# EAGLE board AL60 (EAGLE 5.11)
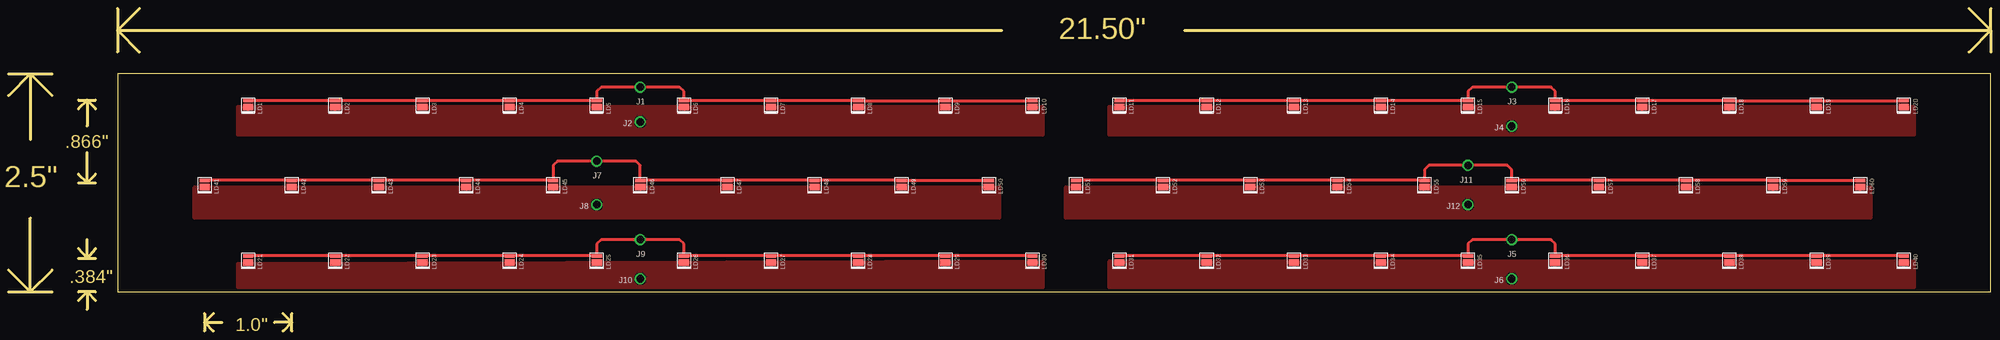
[diagram p0: board, top side]

Size 577.85 x 93.98 mm. Coordinates in mm from the lower left corner, seen from the top.
Outline: 0,74.93 6.35,74.93
Outline: 6.35,74.93 12.7,74.93
Outline: 6.35,74.93 0,68.58
Outline: 6.35,74.93 12.7,68.58
Outline: 0,11.43 6.35,11.43
Outline: 6.35,11.43 12.7,11.43
Outline: 6.35,11.43 12.7,17.78
Outline: 6.35,11.43 0,17.78
Outline: 6.35,74.93 6.35,55.88
Outline: 6.35,11.43 6.35,33.02
Outline: 31.75,93.98 31.75,87.63
Outline: 31.75,87.63 31.75,81.28
Outline: 31.75,87.63 38.1,93.98
Outline: 31.75,87.63 38.1,81.28
Outline: 31.75,87.63 289.56,87.63
Outline: 342.9,87.63 577.85,87.63
Outline: 577.85,87.63 577.85,81.28
Outline: 577.85,87.63 577.85,93.98
Outline: 577.85,87.63 571.5,93.98
Outline: 577.85,87.63 571.5,81.28
Outline: 20.32,67.31 22.86,67.31
Outline: 22.86,67.31 25.4,67.31
Outline: 20.32,43.18 22.86,43.18
Outline: 22.86,43.18 25.4,43.18
Outline: 22.86,67.31 20.32,64.77
Outline: 22.86,67.31 25.4,64.77
Outline: 22.86,67.31 22.86,59.69
Outline: 22.86,43.18 20.32,45.72
Outline: 22.86,43.18 25.4,45.72
Outline: 22.86,43.18 22.86,52.07
Outline: 82.55,0 82.55,2.54
Outline: 82.55,2.54 82.55,5.08
Outline: 82.55,2.54 80.01,0
Outline: 82.55,2.54 80.01,5.08
Outline: 82.55,2.54 77.47,2.54
Outline: 57.15,5.08 57.15,2.54
Outline: 57.15,2.54 57.15,0
Outline: 57.15,2.54 59.69,5.08
Outline: 57.15,2.54 59.69,0
Outline: 57.15,2.54 62.23,2.54
Outline: 20.32,21.18 22.86,21.18
Outline: 22.86,21.18 25.4,21.18
Outline: 22.86,21.18 20.32,24.13
Outline: 22.86,21.18 25.4,24.13
Outline: 22.86,21.18 22.86,26.67
Outline: 25.4,11.43 22.86,11.43
Outline: 22.86,11.43 20.32,11.43
Outline: 22.86,11.43 25.4,8.89
Outline: 22.86,11.43 20.32,8.89
Outline: 22.86,11.43 22.86,6.35
Outline: 31.75,11.43 577.85,11.43 577.85,74.93 31.75,74.93 31.75,11.43
Copper layers (1*16): Top 0.0356mm / dielectric 1.5011mm / Bottom 0.0356mm
Design rules "oshPark": minimum track width 6mil, minimum drill 13mil, track to track 6mil, track to pad 6mil, pad to pad 6mil, via to via 6mil, smd to smd 6mil, copper to edge 15mil, drill to drill 6mil, minimum pad ring 7mil, minimum via ring 7mil, stop-mask expansion 4mil, vias tented up to drill 0mil, thermal gap 10mil

## Footprints (pad centres in the part's own frame; a part is rotated, then mirrored left to right if it is on the bottom)
14AWG-SOLDERPOINT = drill 2.2 round: P$1 0,0
DS_XHB = smd 0.95 x 3: ANODE 0.725,0 | smd 1.85 x 3: CATHODE -1.175,0

## Placement (x,y rotation side)
J1  HDR-1X1-14AWG  [14AWG-SOLDERPOINT]  184.15,71.12 0 top
J2  HDR-1X1-14AWG  [14AWG-SOLDERPOINT]  184.15,60.96 0 top
J3  HDR-1X1-14AWG  [14AWG-SOLDERPOINT]  438.15,71.12 0 top
J4  HDR-1X1-14AWG  [14AWG-SOLDERPOINT]  438.15,59.69 0 top
J5  HDR-1X1-14AWG  [14AWG-SOLDERPOINT]  438.15,26.67 0 top
J6  HDR-1X1-14AWG  [14AWG-SOLDERPOINT]  438.15,15.24 0 top
J7  HDR-1X1-14AWG  [14AWG-SOLDERPOINT]  171.45,49.53 0 top
J8  HDR-1X1-14AWG  [14AWG-SOLDERPOINT]  171.45,36.83 0 top
J9  HDR-1X1-14AWG  [14AWG-SOLDERPOINT]  184.15,26.67 0 top
J10  HDR-1X1-14AWG  [14AWG-SOLDERPOINT]  184.15,15.24 0 top
J11  HDR-1X1-14AWG  [14AWG-SOLDERPOINT]  425.45,48.26 0 top
J12  HDR-1X1-14AWG  [14AWG-SOLDERPOINT]  425.45,36.83 0 top
LD1  LED-DS_XHB  [DS_XHB]  69.85,66.45 90 top
LD2  LED-DS_XHB  [DS_XHB]  95.25,66.45 90 top
LD3  LED-DS_XHB  [DS_XHB]  120.65,66.45 90 top
LD4  LED-DS_XHB  [DS_XHB]  146.05,66.45 90 top
LD5  LED-DS_XHB  [DS_XHB]  171.45,66.45 90 top
LD6  LED-DS_XHB  [DS_XHB]  196.85,66.45 90 top
LD7  LED-DS_XHB  [DS_XHB]  222.25,66.45 90 top
LD8  LED-DS_XHB  [DS_XHB]  247.65,66.45 90 top
LD9  LED-DS_XHB  [DS_XHB]  273.05,66.45 90 top
LD10  LED-DS_XHB  [DS_XHB]  298.45,66.45 90 top
LD11  LED-DS_XHB  [DS_XHB]  323.85,66.45 90 top
LD12  LED-DS_XHB  [DS_XHB]  349.25,66.45 90 top
LD13  LED-DS_XHB  [DS_XHB]  374.65,66.45 90 top
LD14  LED-DS_XHB  [DS_XHB]  400.05,66.45 90 top
LD15  LED-DS_XHB  [DS_XHB]  425.45,66.45 90 top
LD16  LED-DS_XHB  [DS_XHB]  450.85,66.45 90 top
LD17  LED-DS_XHB  [DS_XHB]  476.25,66.45 90 top
LD18  LED-DS_XHB  [DS_XHB]  501.65,66.45 90 top
LD19  LED-DS_XHB  [DS_XHB]  527.05,66.45 90 top
LD20  LED-DS_XHB  [DS_XHB]  552.45,66.45 90 top
LD21  LED-DS_XHB  [DS_XHB]  69.85,21.18 90 top
LD22  LED-DS_XHB  [DS_XHB]  95.25,21.18 90 top
LD23  LED-DS_XHB  [DS_XHB]  120.65,21.18 90 top
LD24  LED-DS_XHB  [DS_XHB]  146.05,21.18 90 top
LD25  LED-DS_XHB  [DS_XHB]  171.45,21.18 90 top
LD26  LED-DS_XHB  [DS_XHB]  196.85,21.18 90 top
LD27  LED-DS_XHB  [DS_XHB]  222.25,21.18 90 top
LD28  LED-DS_XHB  [DS_XHB]  247.65,21.18 90 top
LD29  LED-DS_XHB  [DS_XHB]  273.05,21.18 90 top
LD30  LED-DS_XHB  [DS_XHB]  298.45,21.18 90 top
LD31  LED-DS_XHB  [DS_XHB]  323.85,21.18 90 top
LD32  LED-DS_XHB  [DS_XHB]  349.25,21.18 90 top
LD33  LED-DS_XHB  [DS_XHB]  374.65,21.18 90 top
LD34  LED-DS_XHB  [DS_XHB]  400.05,21.18 90 top
LD35  LED-DS_XHB  [DS_XHB]  425.45,21.18 90 top
LD36  LED-DS_XHB  [DS_XHB]  450.85,21.18 90 top
LD37  LED-DS_XHB  [DS_XHB]  476.25,21.18 90 top
LD38  LED-DS_XHB  [DS_XHB]  501.65,21.18 90 top
LD39  LED-DS_XHB  [DS_XHB]  527.05,21.18 90 top
LD40  LED-DS_XHB  [DS_XHB]  552.45,21.18 90 top
LD41  LED-DS_XHB  [DS_XHB]  57.15,43.18 90 top
LD42  LED-DS_XHB  [DS_XHB]  82.55,43.18 90 top
LD43  LED-DS_XHB  [DS_XHB]  107.95,43.18 90 top
LD44  LED-DS_XHB  [DS_XHB]  133.35,43.18 90 top
LD45  LED-DS_XHB  [DS_XHB]  158.75,43.18 90 top
LD46  LED-DS_XHB  [DS_XHB]  184.15,43.18 90 top
LD47  LED-DS_XHB  [DS_XHB]  209.55,43.18 90 top
LD48  LED-DS_XHB  [DS_XHB]  234.95,43.18 90 top
LD49  LED-DS_XHB  [DS_XHB]  260.35,43.18 90 top
LD50  LED-DS_XHB  [DS_XHB]  285.75,43.18 90 top
LD51  LED-DS_XHB  [DS_XHB]  311.15,43.18 90 top
LD52  LED-DS_XHB  [DS_XHB]  336.55,43.18 90 top
LD53  LED-DS_XHB  [DS_XHB]  361.95,43.18 90 top
LD54  LED-DS_XHB  [DS_XHB]  387.35,43.18 90 top
LD55  LED-DS_XHB  [DS_XHB]  412.75,43.18 90 top
LD56  LED-DS_XHB  [DS_XHB]  438.15,43.18 90 top
LD57  LED-DS_XHB  [DS_XHB]  463.55,43.18 90 top
LD58  LED-DS_XHB  [DS_XHB]  488.95,43.18 90 top
LD59  LED-DS_XHB  [DS_XHB]  514.35,43.18 90 top
LD60  LED-DS_XHB  [DS_XHB]  539.75,43.18 90 top

## Library data of the parts
J1-J12 = Mechanical
LD1-LD60 = Discrete

## Nets
GND_1: J2.P$1 LD1.CATHODE LD2.CATHODE LD3.CATHODE LD4.CATHODE LD5.CATHODE LD6.CATHODE LD7.CATHODE LD8.CATHODE LD9.CATHODE LD10.CATHODE
GND_2: J4.P$1 LD11.CATHODE LD12.CATHODE LD13.CATHODE LD14.CATHODE LD15.CATHODE LD16.CATHODE LD17.CATHODE LD18.CATHODE LD19.CATHODE LD20.CATHODE
GND_3: J6.P$1 LD31.CATHODE LD32.CATHODE LD33.CATHODE LD34.CATHODE LD35.CATHODE LD36.CATHODE LD37.CATHODE LD38.CATHODE LD39.CATHODE LD40.CATHODE
GND_4: J8.P$1 LD41.CATHODE LD42.CATHODE LD43.CATHODE LD44.CATHODE LD45.CATHODE LD46.CATHODE LD47.CATHODE LD48.CATHODE LD49.CATHODE LD50.CATHODE
GND_5: J10.P$1 LD21.CATHODE LD22.CATHODE LD23.CATHODE LD24.CATHODE LD25.CATHODE LD26.CATHODE LD27.CATHODE LD28.CATHODE LD29.CATHODE LD30.CATHODE
GND_6: J12.P$1 LD51.CATHODE LD52.CATHODE LD53.CATHODE LD54.CATHODE LD55.CATHODE LD56.CATHODE LD57.CATHODE LD58.CATHODE LD59.CATHODE LD60.CATHODE
VCC_S1: J1.P$1 LD1.ANODE LD2.ANODE LD3.ANODE LD4.ANODE LD5.ANODE LD6.ANODE LD7.ANODE LD8.ANODE LD9.ANODE LD10.ANODE
VCC_S2: J3.P$1 LD11.ANODE LD12.ANODE LD13.ANODE LD14.ANODE LD15.ANODE LD16.ANODE LD17.ANODE LD18.ANODE LD19.ANODE LD20.ANODE
VCC_S3: J5.P$1 LD31.ANODE LD32.ANODE LD33.ANODE LD34.ANODE LD35.ANODE LD36.ANODE LD37.ANODE LD38.ANODE LD39.ANODE LD40.ANODE
VCC_S4: J7.P$1 LD41.ANODE LD42.ANODE LD43.ANODE LD44.ANODE LD45.ANODE LD46.ANODE LD47.ANODE LD48.ANODE LD49.ANODE LD50.ANODE
VCC_S5: J9.P$1 LD21.ANODE LD22.ANODE LD23.ANODE LD24.ANODE LD25.ANODE LD26.ANODE LD27.ANODE LD28.ANODE LD29.ANODE LD30.ANODE
VCC_S6: J11.P$1 LD51.ANODE LD52.ANODE LD53.ANODE LD54.ANODE LD55.ANODE LD56.ANODE LD57.ANODE LD58.ANODE LD59.ANODE LD60.ANODE

## Tracks (layer width: path | path; a pad name or v marks a point on that pad's centre or on a via)
GND_1
  pour Top: 69.85,65.41 66.67,65.41 66.67,64.77 66.67,58.42 66.67,57.15 301.62,57.15 301.62,65.41
GND_2
  pour Top: 323.85,65.41 320.68,65.41 320.68,57.15 555.62,57.15 555.62,65.41
GND_3
  pour Top: 323.85,20.32 321.31,20.32 320.68,20.32 320.68,12.7 555.62,12.7 555.62,20.32
GND_4
  pour Top: 57.15,41.91 53.98,41.91 53.98,34.29 53.98,33.02 288.93,33.02 288.93,41.91
GND_5
  pour Top: 69.85,19.69 66.67,19.69 66.67,12.7 301.62,12.7 301.62,20.32
GND_6
  pour Top: 311.15,41.91 307.98,41.91 307.98,33.02 542.92,33.02 542.92,41.91
VCC_S1
  Top 0.813: LD1.ANODE LD2.ANODE LD3.ANODE LD4.ANODE LD5.ANODE 171.45,69.85 172.72,71.12 J1.P$1 195.58,71.12 196.85,69.85 LD6.ANODE LD7.ANODE LD8.ANODE LD9.ANODE LD10.ANODE
VCC_S2
  Top 0.813: LD11.ANODE LD12.ANODE LD13.ANODE LD14.ANODE LD15.ANODE 425.45,69.85 426.72,71.12 J3.P$1 449.58,71.12 450.85,69.85 LD16.ANODE LD17.ANODE LD18.ANODE LD19.ANODE LD20.ANODE
VCC_S3
  Top 0.813: LD31.ANODE LD32.ANODE LD33.ANODE LD34.ANODE LD35.ANODE 425.45,25.4 426.72,26.67 J5.P$1 449.58,26.67 450.85,25.4 LD36.ANODE LD37.ANODE LD38.ANODE LD39.ANODE LD40.ANODE
VCC_S4
  Top 0.813: LD41.ANODE LD42.ANODE LD43.ANODE LD44.ANODE LD45.ANODE 158.75,48.26 160.02,49.53 J7.P$1 182.88,49.53 184.15,48.26 LD46.ANODE LD47.ANODE LD48.ANODE LD49.ANODE LD50.ANODE
VCC_S5
  Top 0.813: LD21.ANODE LD22.ANODE LD23.ANODE LD24.ANODE LD25.ANODE 171.45,25.4 172.72,26.67 J9.P$1 195.58,26.67 196.85,25.4 LD26.ANODE LD27.ANODE LD28.ANODE LD29.ANODE LD30.ANODE
VCC_S6
  Top 0.813: LD51.ANODE LD52.ANODE LD53.ANODE LD54.ANODE LD55.ANODE 412.75,46.99 414.02,48.26 J11.P$1 436.88,48.26 438.15,46.99 LD56.ANODE LD57.ANODE LD58.ANODE LD59.ANODE LD60.ANODE

## Text on the board
Dimension: 21.50" | .866" | 2.5" | .384" | 1.0"